# Altium PCB EngineHeater_HW.PcbDoc
Units mm, origin at the board's own origin, x right, y up, seen from the top; angles counter-clockwise.
Board outline 48.77 x 33.53 mm, 2 copper layers (Top Layer, Bottom Layer); 23 components, 15 nets, 63 pads, 16 vias.
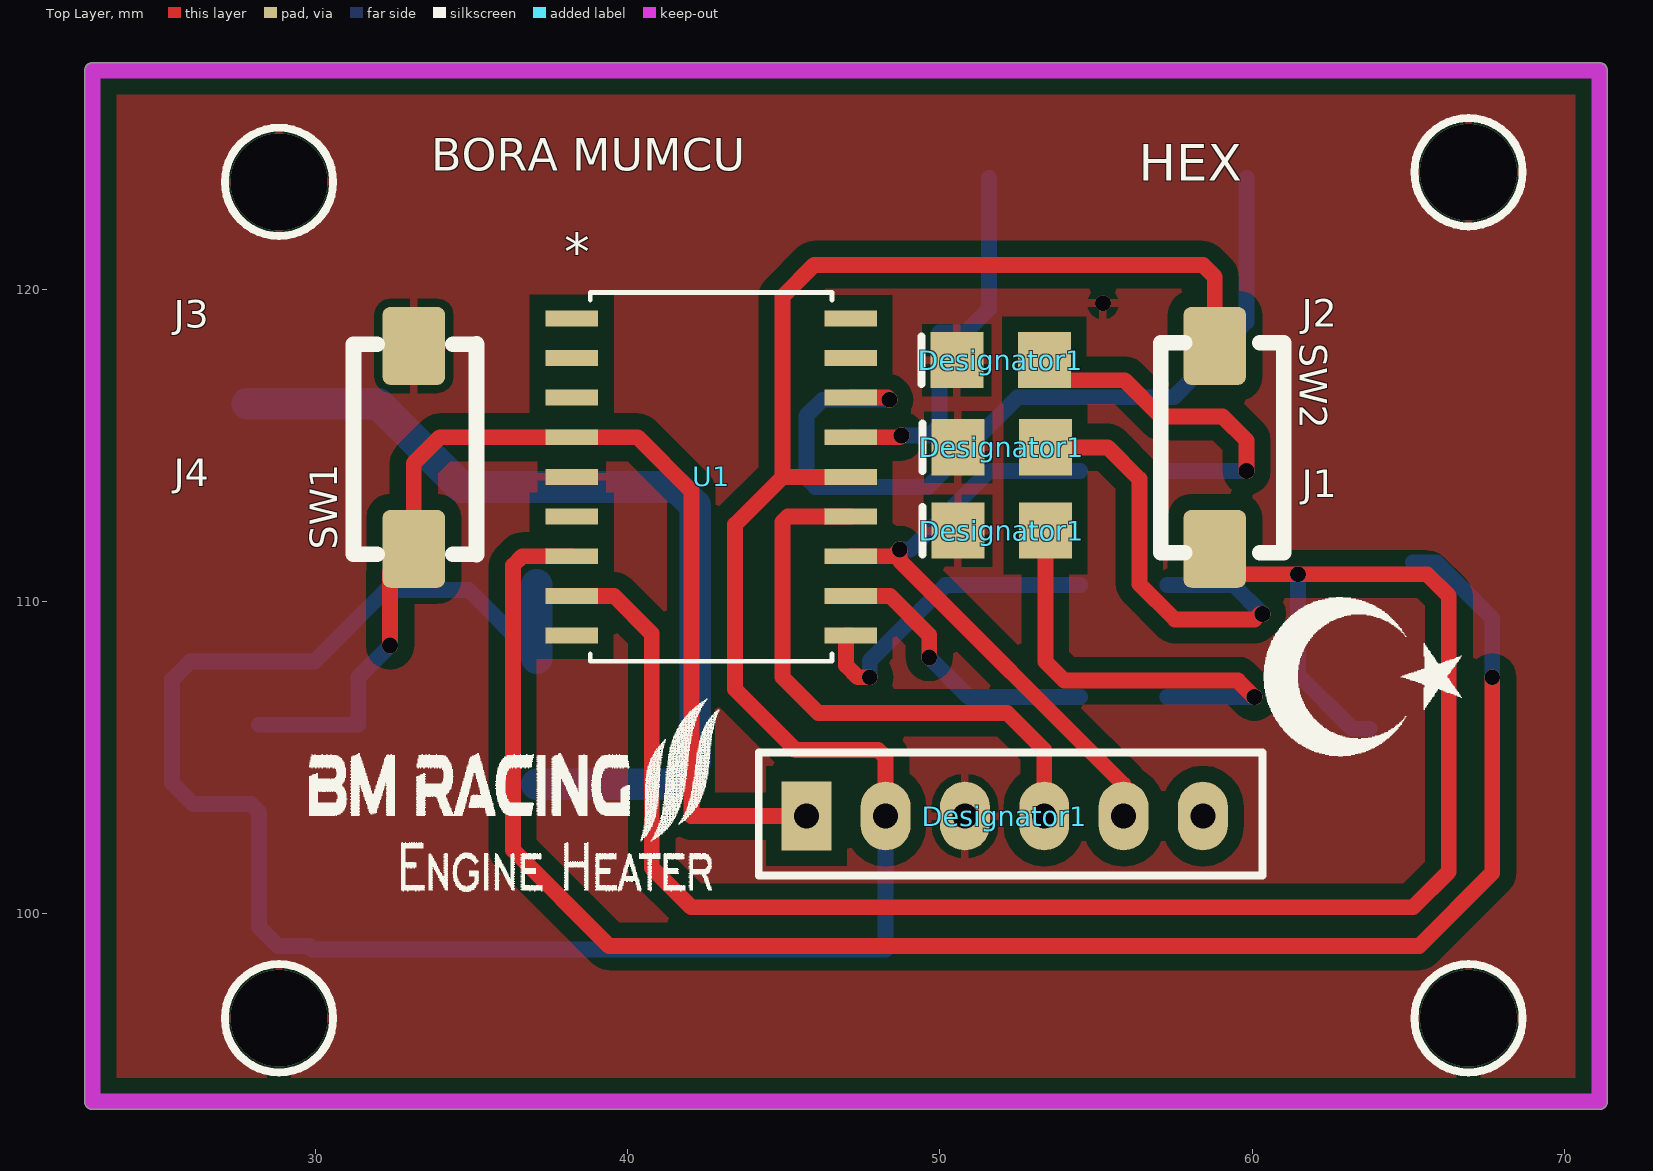
[diagram p0: Top Layer view]
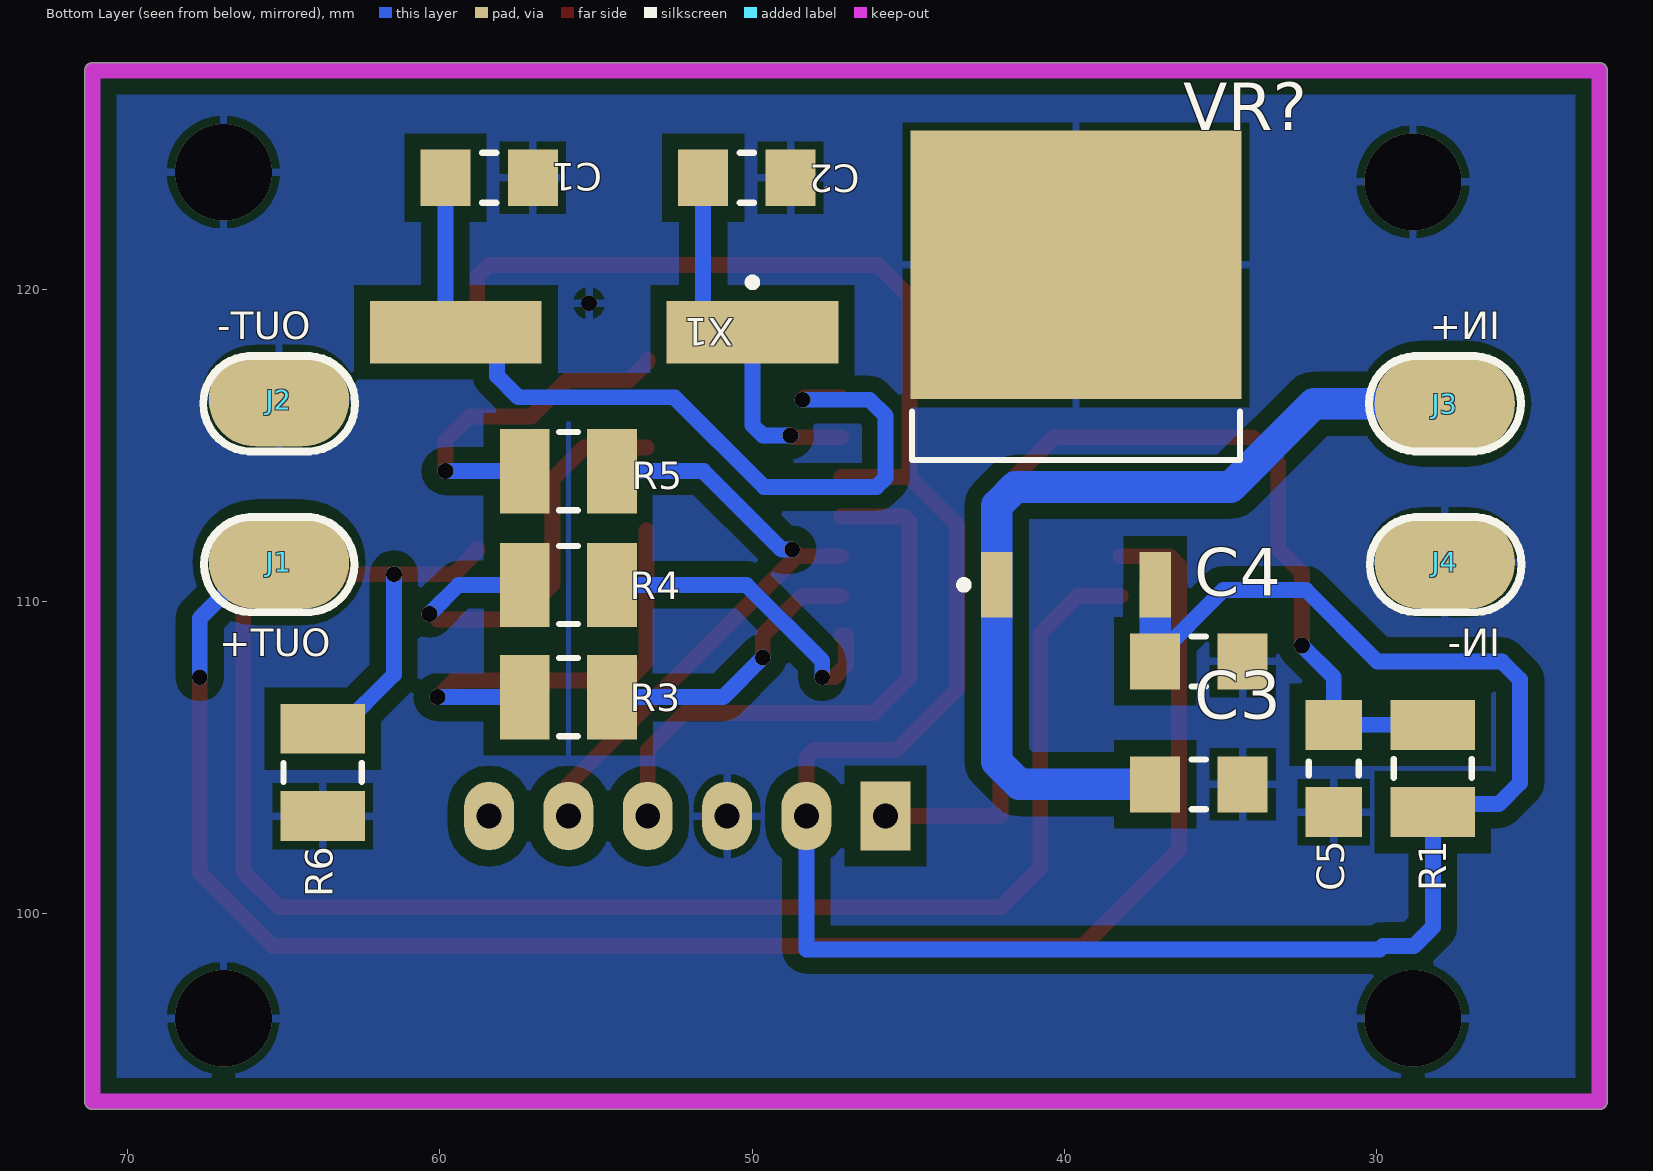
[diagram p1: Bottom Layer view, seen from below]
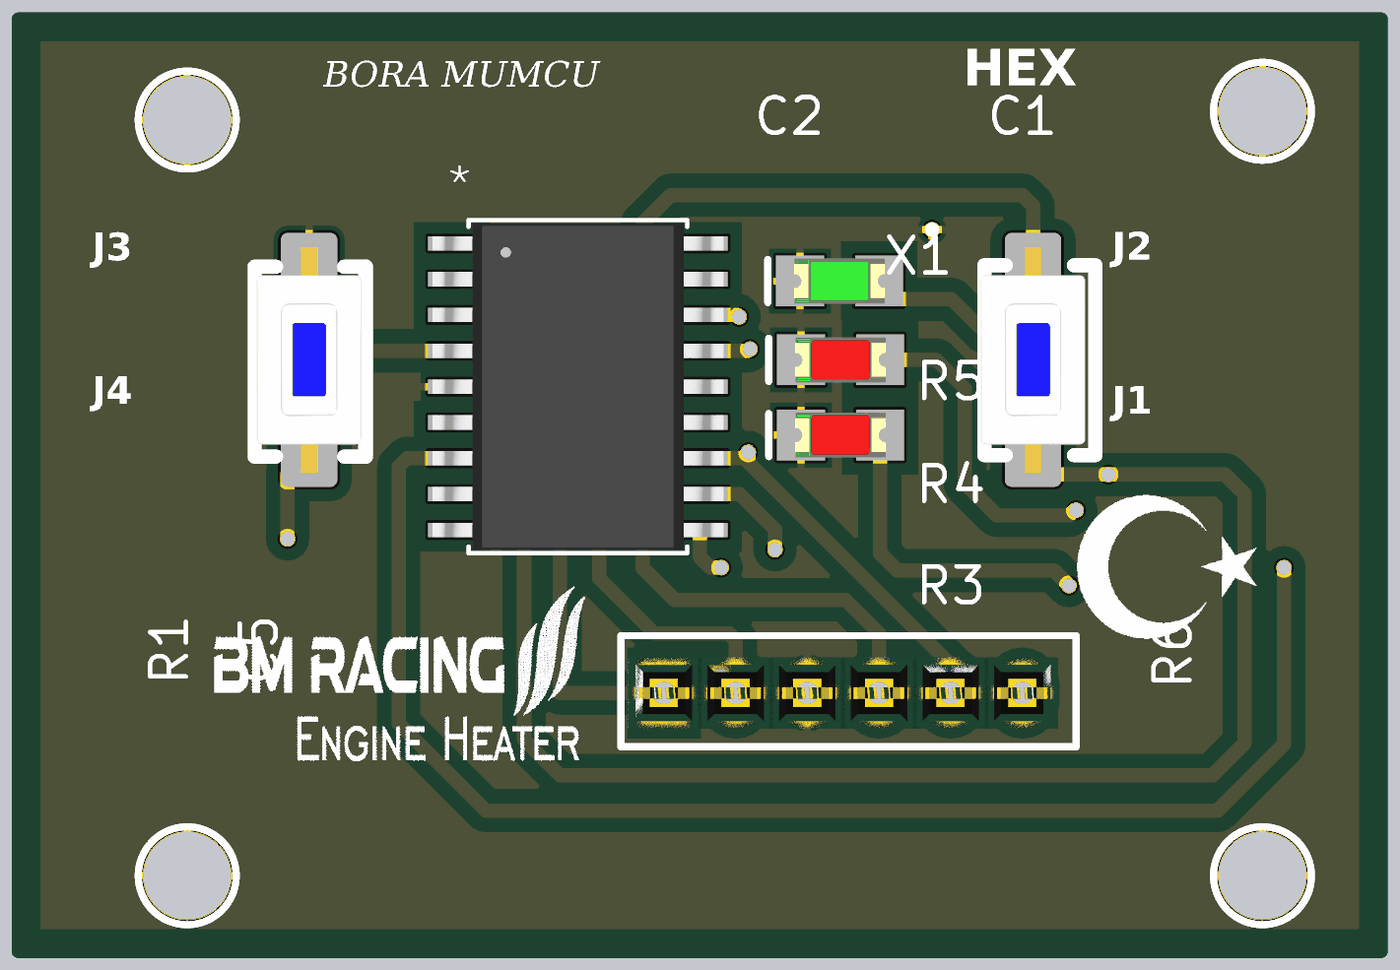
[diagram p2: 3D render of the assembled board from above, using the file's embedded part models]
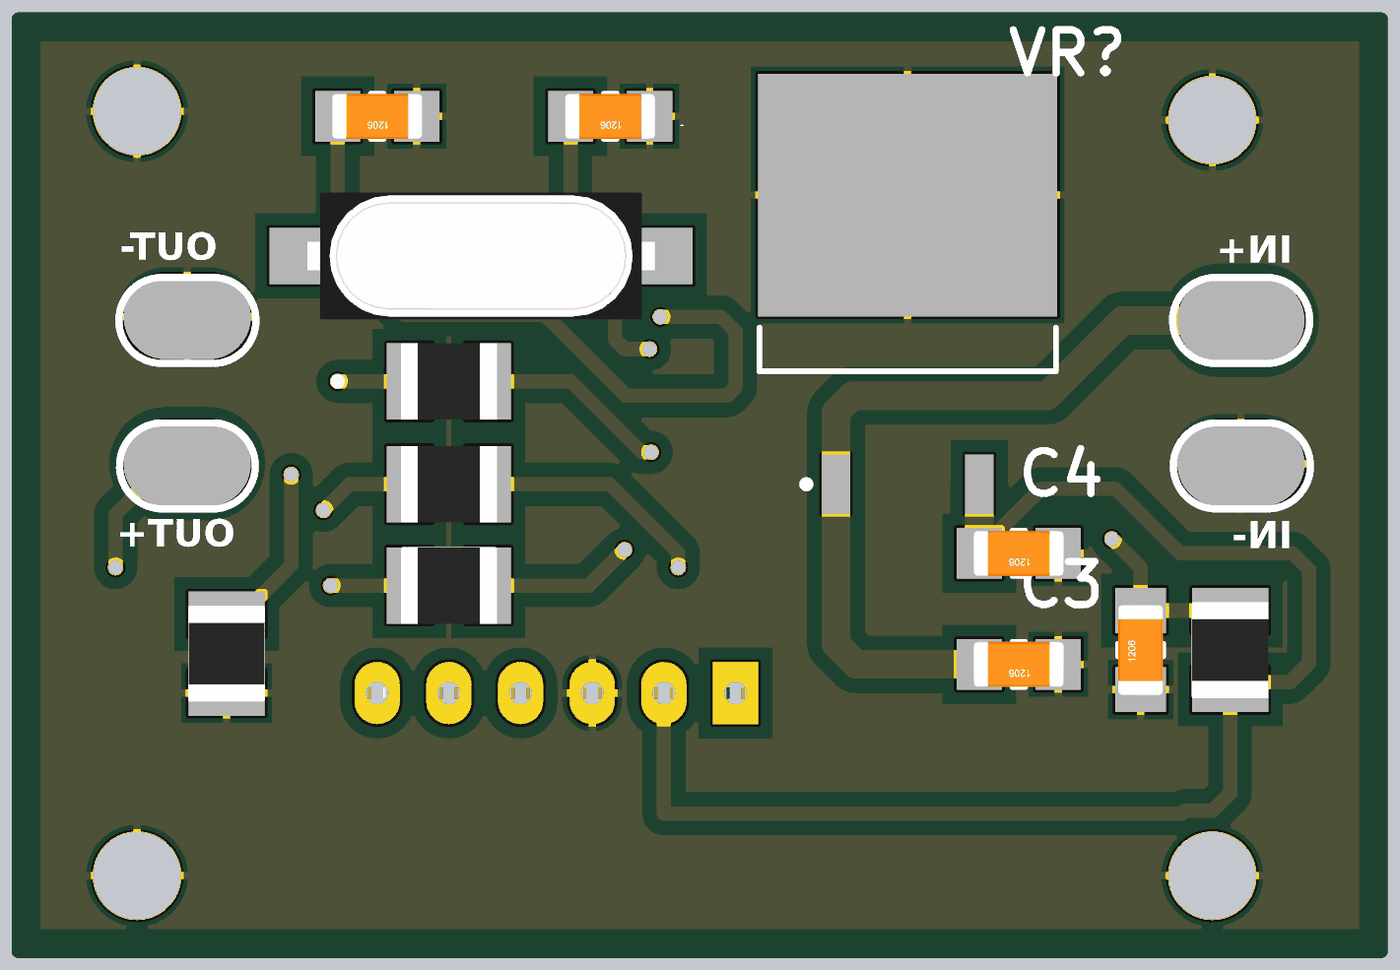
[diagram p3: 3D render of the assembled board from below, using the file's embedded part models]

## Layer stack, top to bottom
Top Solder: solder mask 0.0102, Solder Resist, Dk 3.5
Top Layer: signal copper 0.0356
Dielectric 1: dielectric 0.32, FR-4, Dk 4.8
Bottom Layer: signal copper 0.0356
Bottom Solder: solder mask 0.0102, Solder Resist, Dk 3.5

## Board outline
22.86,93.726 cw(c22.86,93.98) 22.606,93.98 22.606,127 cw(c22.86,127) 22.86,127.254 71.12,127.254 cw(c71.12,127) 71.374,127 71.374,93.98 cw(c71.12,93.98) 71.12,93.726

## Design rules (kind name [scope] priority, off if disabled: settings)
Clearance [All] p1: gap=0.508 ignorepadtopadclearanceinfootprint=FALSE
PolygonConnect [All] p1: connectstyle=Relief reliefconductorwidth=0.254 reliefentries=4 polygonreliefangle="90 Angle" airgapwidth=0.254
RoutingVias [All] p1: holewidth=0.711 width=1.27 viastyle="Through Hole" minholewidth=0.711 minwidth=1.27 maxholewidth=0.711 maxwidth=1.27
SolderMaskExpansion [All] p1: expansion=0.102 istentingtop=FALSE
Width [All] p1: maxlimit=2.54 minlimit=0.254 preferedwidth=0.508
30 further rules are at their usual default settings.

## Components (designator, comment, footprint, x,y, rotation, side; value= is the part's Value field where it differs from the comment)
C1 "ADJ" C-1206 58.42,123.571 r0 bottom
C2 "30uF" C-1206 50.165,123.571 r0 bottom
C3 "330nF 50V" C-1206 35.687,104.14 r0 bottom
C4 "0.1uF" C-1206 35.687,108.077 r0 bottom
C5 "0.1uF" C-1206 31.369,104.648 r90 bottom
Designator1 "Green" Diode_1206_Green 51.943,117.729 r180 top (schematic designator D3)
Designator1 "PicKit3" PicKit3 58.42,103.124 r90 top (schematic designator P3)
Designator1 "Red" Diode_1206_Red 51.977,114.935 r180 top (schematic designator D2)
Designator1 "Red" Diode_1206_Red 51.977,112.268 r180 top (schematic designator D1)
J1 "TestPoint" Testpoint 65.151,111.252 r0 top
J2 "TestPoint" Testpoint 65.151,116.459 r0 top
J3 "TestPoint" Testpoint 27.813,116.332 r0 top
J4 "TestPoint" Testpoint 27.813,111.252 r0 top
R1 "10k" R-1210 28.194,104.648 r270 bottom
R3 "470R" R-1210 55.88,106.934 r180 bottom
R4 "470R" R-1210 55.88,110.525 r180 bottom
R5 "470R" R-1210 55.88,114.173 r180 bottom
R6 "10k" R-1210 63.754,104.521 r90 bottom
SW1 "2 Pin Tactile Switch" TACT_PHAP3365R 33.147,114.935 r270 top
SW2 "2 Pin Tactile Switch" TACT_PHAP3365R 58.801,114.935 r270 top
U1 "PIC16F54-ISO" pic16f54 42.672,113.986 r0 top
VR? "Volt Reg" D2PAK_L 39.624,117.277 r90 bottom
X1 "32.768kHz" HC49_SMD_A 54.737,118.618 r0 bottom

## Footprints (in the part's own frame and the unit in brackets; to place one, negate y for a bottom-side part, rotate by r counter-clockwise, add the part's x,y. Pads: shape width x height; smd on the part's side, far side on the other; paste and mask are expansions set on the pad)
C-1206 [mm] "Chip Resistor; Body 3.2 x 1.6 mm (LxW typ)"
  rect 1.6x1.8 smd: 1(-1.4,0) 2(1.4,0)
  silkscreen extent -0.22,-0.8 0.23,0.8, body extent -1.6,-0.8 1.6,0.8, height 1
D2PAK_L [mm] "D2-PAK, 4-Leads, Body 8.8x10.4mm, Pitch 2.54mm, Lead Span 15.1mm, IPC High Density"
  rect 2.1x1 smd: 1(-6.75,2.54) 3(-6.75,-2.54)
  rect 8.6x10.6 smd: 2(3.5,0)
  silkscreen extent -6.87,-5.25 -1.2,5.25, body extent -2.75,-5.28 6.25,5.28, height 4.69
Diode_1206_Green [mm]
  rect 1.7x1.8 smd: 1(-1.4,0) 2(1.4,0)
  silkscreen extent 2.54,-0.76 2.54,0.76, body extent -1.61,-0.8 1.61,0.8, height 1.1
Diode_1206_Red [mm]
  rect 1.7x1.8 smd: 1(-1.4,0) 2(1.4,0)
  silkscreen extent 2.54,-0.76 2.54,0.76, body extent -1.61,-0.8 1.61,0.8, height 1.1
HC49_SMD_A [mm]
  rect 5.5x2 smd: 1(-4.75,0) 2(4.75,0)
  silkscreen extent -4.87,-1.72 -4.62,-1.48, body extent -6.15,-2.25 6.15,2.25, height 5.18
pic16f54 [mil] "SOIC18-W"
  rect 66x20 smd: 1(-176,200) 2(-176,150) 3(-176,100) 4(-176,50) 5(-176,0) 6(-176,-50) 7(-176,-100) 8(-176,-150) 9(-176,-200) 10(176,-200) 11(176,-150) 12(176,-100) 13(176,-50) 14(176,0) 15(176,50) 16(176,100) 17(176,150) 18(176,200)
  silkscreen extent -152,-232 152,232, body extent -203,-227 203,227, height 104
PicKit3 [mm]
  rect 2.2x1.6 hole 0.8: 1(0,12.7)
  oval 2.2x1.6 hole 0.8: 2(0,10.16) 3(0,7.62) 4(0,5.08) 5(0,2.54) 6(0,0)
  silkscreen extent -1.91,-1.91 2.03,14.22, body extent -1.27,-1.27 1.27,13.97, height 12.5
R-1210 [mm] "Chip Resistor; Body 3.2 x 2.5 mm (LxW typ)"
  rect 1.6x2.7 smd: 1(-1.4,0) 2(1.4,0)
  silkscreen extent -0.3,-1.25 0.3,1.25, body extent -1.7,-1.36 1.7,1.36, height 0.61
TACT_PHAP3365R [mm]
  rrect25% 2.5x2 smd paste+0: 1(-3.25,0)
  rrect25% 2.5x2 smd: 2(3.25,0)
  body extent -4,-1.85 4,1.85, height 2.5
Testpoint [mm] "Test Point"
  oval 4.5x3 smd far side: 1(0,0)

## Part data
C1 C2 C3 C4 C5: library part Capacitor
Designator1 Designator1 Designator1: library part LED
R1 R3 R4 R5 R6: library part Resistor
SW1 SW2: library part "Tactile Switch"
U1: Manufacturer_Part_Number=PIC16F54-I/SO, Built_By=EMA_UL_Team, C="Copyright (C) 2015 Accelerated Designs. All rights reserved", SourceLibrary=Microchip_2011-05-13, Vendor=Microchip
VR?: "Voltage Regulator", LatestRevisionDate=29-May-2009, LatestRevisionNote="IPC-7351 Footprint Added.", PackageDescription="3-Pin Transistor Outline Package 2.54 mm Pitch, 15.1 mm Lead Span", PackageReference=D2PAK, Published=24-Mar-1999, Publisher="Altium Limited"
X1: library part Crystal_HC49, "Crystal"

## Via types
v1: diameter 0.508, hole 0.508, Top Layer to Bottom Layer, 12 vias
v2: diameter 3.1, hole 3.1, Top Layer to Bottom Layer, 4 vias

## Nets (pads, with @x,y where several pads share a name; then routed paths per layer and width w, separated by ;. In a path a pad name is that pad's centre, name@x,y a point inside that pad or via, vN(x,y) a via of type N, cw(c..) or ccw(c..) an arc to the next point about the centre after c; other vN are vias at no path point)
Button1: R6.2 SW2.2 U1.8 | length 60.3
  Top Layer w0.508: U1.8 39.557,110.176 40.767,108.966 40.767,101.473 42.037,100.203 65.151,100.203 66.294,101.346 66.294,110.176 65.599,110.871 59.547,110.871 58.801,111.617 SW2.2
  Bottom Layer w0.508: v1(61.468,110.871) 61.468,107.657 63.204,105.921 R6.2
GND: C1.1 C2.1 C3.1 C4.1 C5.1 Designator1.2@50.543,117.729 Designator1.2@50.577,112.268 Designator1.2@50.577,114.935 Designator1.3 J2.1 J4.1 R6.1 SW1.1 U1.5 VR?.2
  other v1: 55.22,119.548
  other v2: 28.829,96.647 66.929,96.647 28.829,123.437 66.929,123.749
MCLR: C5.2 Designator1.1@45.72,103.124 R1.1 SW1.2 U1.4 | length 36.3
  Top Layer w0.508: v1(32.385,108.585) 32.385,110.923 SW1.2 33.147,114.427 33.976,115.256 U1.4 40.319,115.256 42.037,113.538 42.037,103.124 Designator1.1@45.72,103.124
  Bottom Layer w0.508: R1.1 C5.2 31.369,107.569 v1(32.385,108.585)
Mosfet: J1.1 U1.7 | length 56.2
  Top Layer w0.508: U1.7 36.62,111.446 36.322,111.148 36.322,102.041 39.405,98.958 65.343,98.958 67.691,101.306 v1(67.691,107.569)
  Bottom Layer w0.508: J1.1 65.901,111.252 67.691,109.462 v1(67.691,107.569)
NetC1_2: C1.2 U1.16 X1.2 | length 27.5
  Top Layer w0.508: U1.16 48.32,116.526 v1(48.387,116.459)
  Bottom Layer w0.508: v1(48.387,116.459) 46.238,116.459 45.72,115.941 45.72,113.963 46.018,113.665 49.614,113.665 52.488,116.539 57.484,116.539 58.166,117.221 58.166,117.872 58.912,118.618 X1.2 59.82,118.951 C1.2
NetC2_2: C2.2 U1.15 X1.1 | length 12.1
  Top Layer w0.508: U1.15 48.708,115.256 v1(48.768,115.316)
  Bottom Layer w0.508: v1(48.768,115.316) 49.657,115.316 49.987,115.646 X1.1 50.819,118.618 51.565,119.364 C2.2
NetD1_1: Designator1.1@53.377,112.268 R3.1 | length 14.1
  Top Layer w0.508: Designator1.1@53.377,112.268 53.377,108.076 53.989,107.464 59.541,107.464 v1(60.071,106.934)
  Bottom Layer w0.508: R3.1 v1(60.071,106.934)
NetD2_1: Designator1.1@53.377,114.935 R4.1 | length 14.7
  Top Layer w0.508: Designator1.1@53.377,114.935 55.372,114.935 56.388,113.919 56.388,110.558 57.527,109.419 60.075,109.419 60.257,109.601 v1(60.325,109.601)
  Bottom Layer w0.508: R4.1 59.401,110.525 v1(60.325,109.601)
NetD3_1: Designator1.1@53.343,117.729 R5.1 | length 11.1
  Top Layer w0.508: Designator1.1@53.343,117.729 53.343,117.679 53.939,117.083 55.915,117.083 57.079,115.919 59.055,115.919 59.817,115.157 v1(59.817,114.173)
  Bottom Layer w0.508: R5.1 v1(59.817,114.173)
PGC: Designator1.5 R5.2 U1.12 | length 20
  Top Layer w0.508: U1.12 48.497,111.446 v1(48.711,111.659) 48.711,111.305 55.88,104.136 Designator1.5
  Bottom Layer w0.508: v1(48.711,111.659) 49.045,111.659 51.559,114.173 R5.2
PGD: Designator1.4 U1.13 | length 18.7
  Top Layer w0.508: U1.13 45.129,112.716 44.958,112.545 44.958,107.569 46.101,106.426 52.153,106.426 53.34,105.239 Designator1.4
Red: R4.2 U1.10 | length 10.3
  Top Layer w0.508: U1.10 46.99,108.906 46.99,107.95 47.371,107.569 v1(47.752,107.569)
  Bottom Layer w0.508: v1(47.752,107.569) 47.752,108.095 50.182,110.525 R4.2
Red2: R3.2 U1.11 | length 9.1
  Top Layer w0.508: U1.11 48.401,110.176 49.657,108.92 v1(49.657,108.204)
  Bottom Layer w0.508: v1(49.657,108.204) 50.927,106.934 R3.2
VCC: C4.2 Designator1.2@48.26,103.124 R1.2 SW2.1 U1.14 VR?.3 | length 90.7
  Top Layer w0.508: U1.14 44.962,113.986 ; Designator1.2@48.26,103.124 48.26,105.002 48.023,105.239 45.383,105.239 43.434,107.188 43.434,112.458 44.962,113.986 ; SW2.1 58.801,120.396 58.42,120.777 45.974,120.777 44.958,119.761 44.958,113.99 44.962,113.986
  Bottom Layer w0.508: C4.2 37.087,108.177 37.086,108.178 34.901,110.363 32.258,110.363 29.972,108.077 25.982,108.077 25.4,107.495 25.4,104.187 26.082,103.505 27.937,103.505 R1.2 28.194,99.568 28.803,98.959 29.787,98.959 29.896,98.85 48.26,98.85 Designator1.2@48.26,103.124
  Bottom Layer w1.016: VR?.3 37.086,110.525 C4.2@37.086,108.178
Vin: C3.2 J3.1 VR?.1 | length 29.3
  Bottom Layer w1.016: J3.1 32.004,116.332 34.671,113.665 41.569,113.665 42.164,113.07 VR?.1 42.164,104.862 41.442,104.14 C3.2
pads on no net: Designator1.6 U1.1 U1.2 U1.3 U1.6 U1.9 U1.17 U1.18

## Polygon pours and split planes (outlines as drawn)
GND on Bottom Layer "GND_L02_P000" (solid, pour order 0): 22.86,127 71.12,127 71.12,93.98 22.86,93.98
GND on Top Layer "GND_L01_P002" (solid, pour order 2): 22.86,127 71.12,127 71.12,93.98 22.86,93.98

## Keep-outs
Keep-Out Layer:
  lines w0.508: 22.86,93.98 71.12,93.98 71.12,127 22.86,127 22.86,93.98

## Silkscreen, mask and mechanical layers (free items; w line width, h text height)
Top Overlay:
  drawing of 3841 lines, arcs and shapes, not listed
  text "BORA MUMCU" at 33.706,123.444 h1.78
  text "HEX" at 56.363,123.088 h2
Bottom Overlay:
  lines w0.025: 47.574,123.241 47.676,123.241 ; 47.6,123.266 47.625,123.266
  lines w0.254: 26.797,109.652 cw(c26.875,111.176) 26.797,112.7 28.765,112.7 cw(c28.687,111.176) 28.766,109.652 26.797,109.652 ; 26.822,114.808 cw(c26.901,116.332) 26.822,117.856 28.791,117.856 cw(c28.713,116.332) 28.791,114.808 26.822,114.808 ; 64.135,109.652 cw(c64.267,111.176) 64.135,112.7 66.103,112.7 cw(c66.025,111.176) 66.104,109.652 64.135,109.652 ; 64.16,114.808 cw(c64.239,116.332) 64.16,117.856 66.129,117.856 cw(c66.051,116.332) 66.129,114.808 64.16,114.808
  text "IN+" at 26.035,118.11 h1.5
  text "OUT-" at 64.135,118.11 h1.5
  text "IN-" at 26.035,107.95 h1.5
  text "OUT+" at 63.5,107.95 h1.5

## Text inside footprints (layer, text, board x,y; h text height)
U1: Top Overlay "*" at 37.973,120.59 h1.2; Mechanical 1 "*" at 39.306,119.688 h0.79